# EAGLE board SM_Shield_Mega_Proto2.0 (EAGLE 9.5.2)
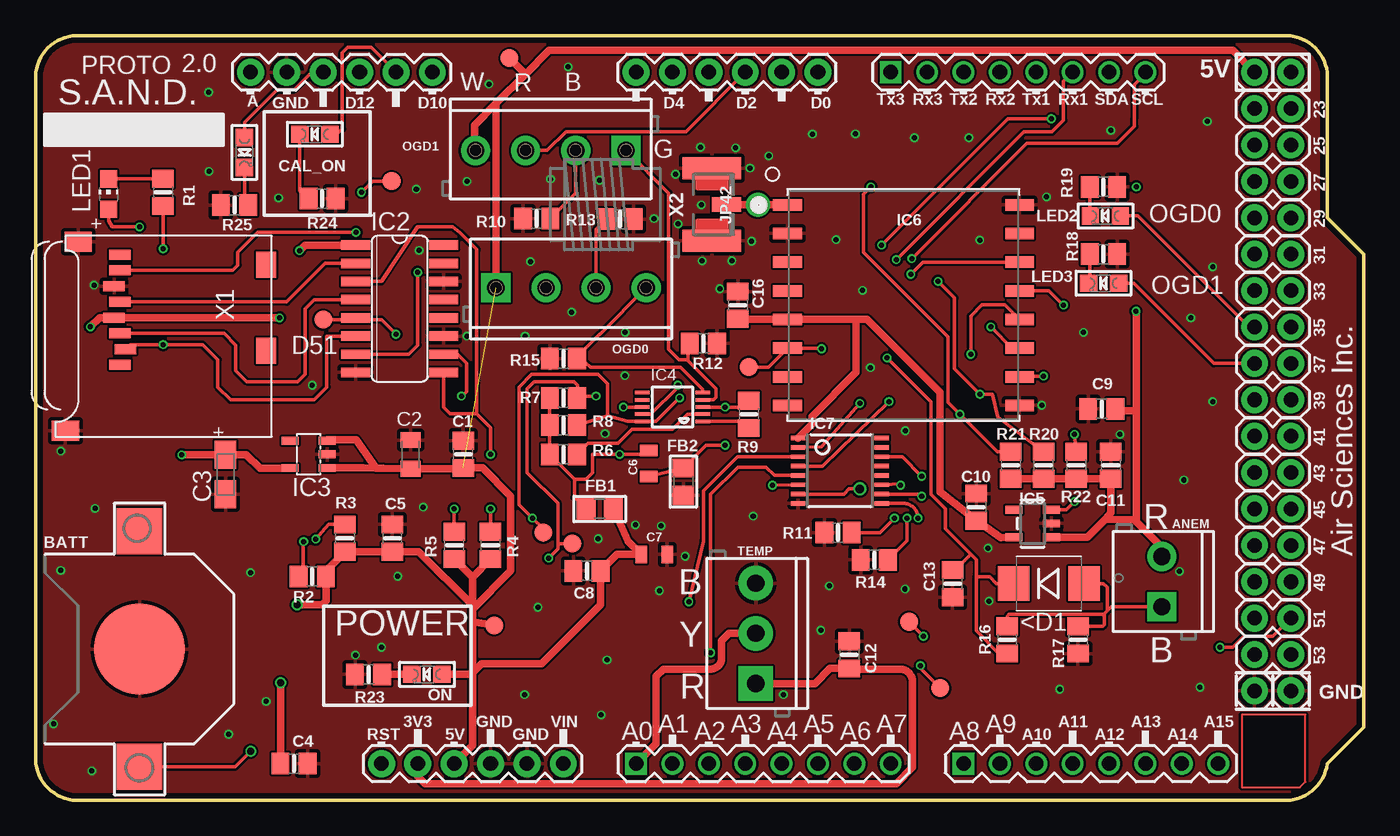
[diagram p0: board, top side]
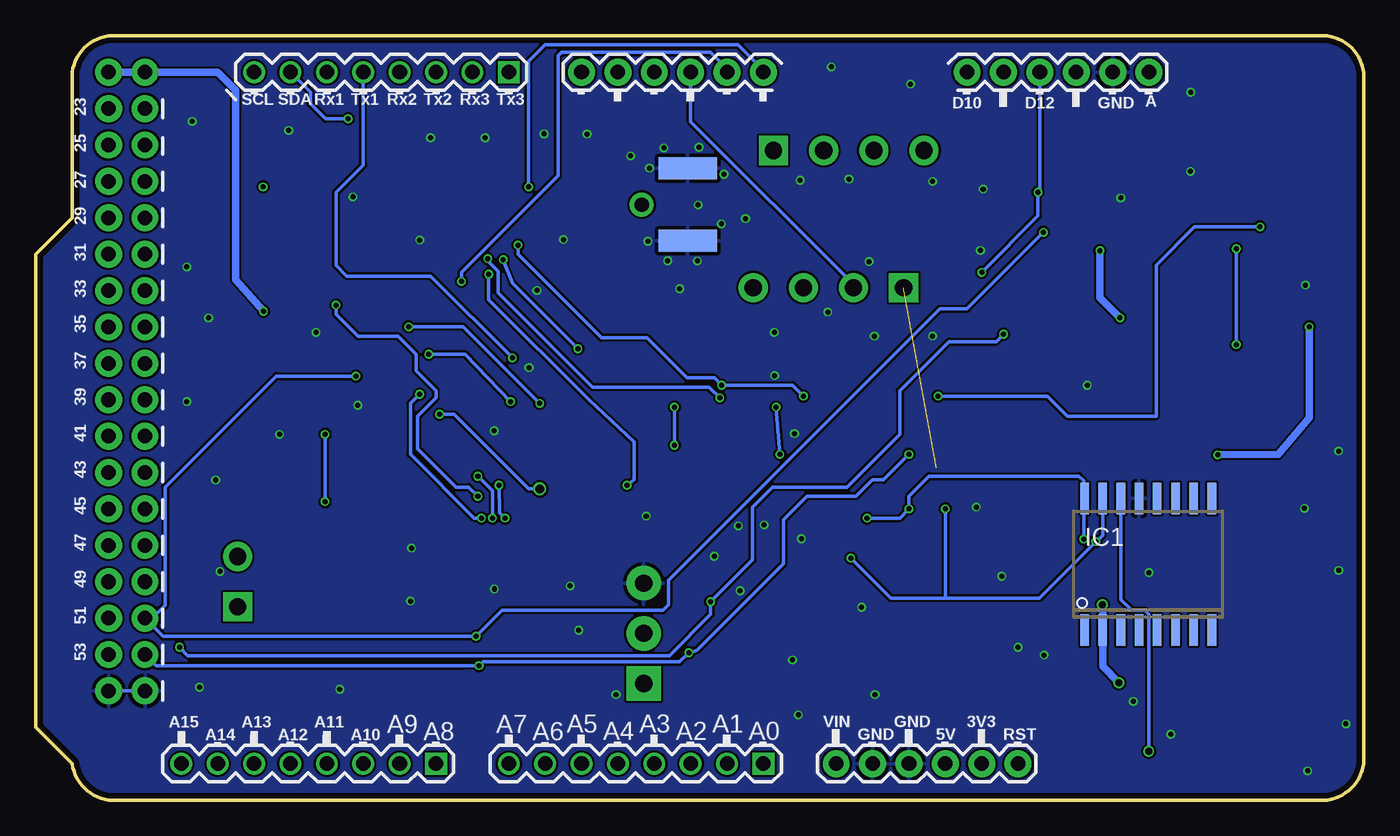
[diagram p1: board, bottom side, seen from below]

Size 92.71 x 53.34 mm. Coordinates in mm from the lower left corner, seen from the top.
Outline: 0,2.54 arc74 2.54,0 87.63,0 arc74 90.17,2.54 92.71,5.08 92.71,38.1 90.17,40.64 90.17,50.8 arc74 87.63,53.34 2.54,53.34 arc74 0,50.8 0,2.54
Copper layers (1*16): Top 0.035559375mm / dielectric 1.6mm / Bottom 0.035559375mm
Design rules "oshpark-2layer": minimum track width 6mil, minimum drill 10mil, track to track 6mil, track to pad 6mil, pad to pad 6mil, via to via 6mil, smd to smd 6mil, copper to edge 15mil, drill to drill 6mil, minimum pad ring 5mil, minimum via ring 5mil, stop-mask expansion 2.5mil, vias tented up to drill 0mil, thermal gap 10mil

## Footprints (pad centres in the part's own frame; a part is rotated, then mirrored left to right if it is on the bottom)
DIODE-HV = smd 2.2 x 2.4: A 2.454,0; C -2.454,0
SCREWTERMINAL-3.5MM-2 = drill 1.2 pad 2.032 square: 1 0,0 | drill 1.2 pad 2.032: 2 3.5,0
CR1220 = smd 3.2 x 3.2: +$1 -8.225,0; +$2 8.225,0 | smd 6.35 x 6.35: - 0,0
0805-NO = smd 1.24 x 1.5: 1 -0.95,0; 2 0.95,0
C0805K = smd 1.1 x 1.4: 1 -1,0; 2 1,0
A/3216-18R = smd 1.95 x 1.5: + 1.375,0; - -1.375,0
0805 = smd 0.8 x 1.2: 1 -0.9,0; 2 0.9,0
CHIPLED_0805 = smd 1.2 x 1.2: A 0,-1.05; C 0,1.05
B1,27 = smd 1.27 x 1.27: TP 0,0
0805' = smd 1.3 x 1.5: 1 -0.95,0; 2 0.95,0
SO16W = smd 0.6 x 2.2: 1 -4.445,-4.6; 2 -3.175,-4.6; 3 -1.905,-4.6; 4 -0.635,-4.6; 5 0.635,-4.6; 6 1.905,-4.6; 7 3.175,-4.6; 8 4.445,-4.6; 9 4.445,4.6; 10 3.175,4.6; 11 1.905,4.6; 12 0.635,4.6; 13 -0.635,4.6; 14 -1.905,4.6; 15 -3.175,4.6; 16 -4.445,4.6
SO16 = smd 0.66 x 2.032: 1 -4.445,-3.073; 2 -3.175,-3.073; 3 -1.905,-3.073; 4 -0.635,-3.073; 5 0.635,-3.073; 6 1.905,-3.073; 7 3.175,-3.073; 8 4.445,-3.073; 9 4.445,3.073; 10 3.175,3.073; 11 1.905,3.073; 12 0.635,3.073; 13 -0.635,3.073; 14 -1.905,3.073; 15 -3.175,3.073; 16 -4.445,3.073
SOT23-5L = smd 0.55 x 1.2: 1 -0.95,-1.3; 2 0,-1.3; 3 0.95,-1.3; 4 0.95,1.3; 5 -0.95,1.3
MSOP10 = smd 0.25 x 1: 1 -1,-2.113; 2 -0.5,-2.113; 3 0,-2.113; 4 0.5,-2.113; 5 1,-2.113; 6 1,2.113; 7 0.5,2.113; 8 0,2.113; 9 -0.5,2.113; 10 -1,2.113
SOT23-5 = smd 0.55 x 1.2: 1 -0.95,-1.3; 2 0,-1.3; 3 0.95,-1.3; 4 0.95,1.3; 5 -0.95,1.3
RFMHCW_SMT = smd 2 x 0.8: 1P 8.1,-7; 2P 8.1,-5; 3P 8.1,-3; 4P 8.1,-1; 5P 8.1,1; 6P 8.1,3; 7P 8.1,5; 8P 8.1,7; 9P -8.1,7; 10P -8.1,5; 11P -8.1,3; 12P -8.1,1; 13P -8.1,-1; 14P -8.1,-3; 15P -8.1,-5; 16P -8.1,-7
TSSOP16 = smd 0.305 x 0.991: 1 -2.275,-2.918; 2 -1.625,-2.918; 3 -0.975,-2.918; 4 -0.325,-2.918; 5 0.325,-2.918; 6 0.975,-2.918; 7 1.625,-2.918; 8 2.275,-2.918; 9 2.275,2.918; 10 1.625,2.918; 11 0.975,2.918; 12 0.325,2.918; 13 -0.325,2.918; 14 -0.975,2.918; 15 -1.625,2.918; 16 -2.275,2.918
1X08 = drill 1.016 square: 1 0,0 | drill 1.016: 2 2.54,0; 3 5.08,0; 4 7.62,0; 5 10.16,0; 6 12.7,0; 7 15.24,0; 8 17.78,0
1X02 = drill 1.016 pad 1.88: 1 0,0; 2 2.54,0
1X06 = drill 1.016 pad 1.88: 1 0,0; 2 2.54,0; 3 5.08,0; 4 7.62,0; 5 10.16,0; 6 12.7,0
1X01_ROUND = drill 1 pad 1.676: 1 0,0
CHIP-LED0805 = smd 1.2 x 1.2: A 0,-1.05; C 0,1.05
SCREWTERMINAL-3.5MM-4 = drill 1.2 pad 2.032 square: 1 0,0 | drill 1.2 pad 2.032: 2 3.5,0; 3 7,0; 4 10.5,0
SCREWTERMINAL-3.5MM-3 = drill 1.2 pad 2.413 square: 1 0,0 | drill 1.2 pad 2.413: 2 3.5,0; 3 7,0
MICROSD = smd 0.7 x 1.5: 1 9,-10.64; 2 7.9,-10.24; 3 6.8,-10.64; 4 5.7,-11.04; 5 4.6,-10.64; 6 3.5,-11.04; 7 2.4,-10.64; 8 1.3,-10.64 | smd 1.8 x 1.4: CD1 2,-0.44; CD2 8,-0.44 | smd 1.4 x 1.9: MT1 0.4,-13.54; MT2 13.6,-14.44
SMA_EDGELAUNCH_UFL = smd 4.064 x 1.524: GND@1 2.032,-2.54; GND@2 2.032,2.54 | smd 4.064 x 1.524 bottom: GND@3 2.032,2.54; GND@4 2.032,-2.54 | smd 2.032 x 1.016: P 3.048,0

## Placement (x,y rotation side)
<D1  [DIODE-HV]  70.74,15.11 0 top
ANEM  [SCREWTERMINAL-3.5MM-2]  78.63,13.5 90 top
BATT  CR1220  [CR1220]  7.24,10.54 90 top
C1  47uF  [0805-NO]  29.84,24.13 90 top
C2  0.1uF  [C0805K]  26.16,24.13 90 top
C3  10uF/10V  [A/3216-18R]  13.25,22.72 90 top
C4  1uF  [0805-NO]  18.03,2.54 180 top
C5  47uF  [0805-NO]  24.89,18.29 90 top
C6  1.0uF  [0805]  42.8,23.5 90 top
C7  1.0uF  [0805]  43.18,17.14 0 top
C8  47uF  [0805-NO]  38.48,16 180 top
C9  47uF  [0805-NO]  74.42,27.3 180 top
C10  10uF  [0805-NO]  65.66,20.45 90 top
C11  10uF  [0805-NO]  75.06,23.37 90 top
C12  47uF  [0805-NO]  56.79,10.13 90 top
C13  47uF  [0805-NO]  64.01,15.11 270 top
C16  0.1uF  [0805-NO]  49.02,34.54 90 top
CAL_ON  GREEN  [CHIPLED_0805]  19.48,46.47 90 top
D50  TPB1,27  [B1,27]  60.96,12.45 0 top
D51  TPB1,27  [B1,27]  20.07,33.53 0 top
D52  TPB1,27  [B1,27]  63.14,7.81 0 top
FB1  MMZ2012Y152B  [0805']  39.37,20.32 180 top
FB2  MMZ2012Y152B  [0805']  45.21,22.23 90 top
IC1  DS3231/SO  [SO16W]  15.05,16.46 0 bottom
IC2  4050D  [SO16]  25.4,34.29 270 top
IC3  LP298XS  [SOT23-5L]  19.05,24.13 90 top
IC4  ADS1115IDGST  [MSOP10]  44.45,27.43 90 top
IC5  AP2112K-3.3  [SOT23-5]  69.6,19.3 90 top
IC6  RFM9X  [RFMHCW_SMT]  60.58,34.54 180 top
IC7  74HC4050D  [TSSOP16]  56.13,22.99 270 top
J2  Analog  [1X08]  41.91,2.54 0 top
J5  Digital_14_21  [1X08]  59.69,50.8 0 top
JP1  [1X02]  87.63,48.26 180 top
JP7  [1X02]  85.09,45.72 0 top
JP8  [1X02]  85.09,43.18 0 top
JP9  [1X02]  85.09,40.64 0 top
JP11  [1X02]  85.09,38.1 0 top
JP15  [1X02]  85.09,35.56 0 top
JP16  [1X02]  85.09,33.02 0 top
JP17  [1X02]  85.09,30.48 0 top
JP19  [1X02]  85.09,27.94 0 top
JP23  [1X02]  85.09,25.4 0 top
JP24  [1X02]  85.09,22.86 0 top
JP25  [1X02]  85.09,20.32 0 top
JP27  [1X02]  85.09,17.78 0 top
JP29  [1X02]  85.09,15.24 0 top
JP31  [1X02]  85.09,12.7 0 top
JP33  [1X02]  85.09,10.16 0 top
JP34  [1X02]  85.09,50.8 0 top
JP35  [1X02]  85.09,7.62 0 top
JP36  [1X06]  54.61,50.8 180 top
JP38  [1X06]  14.99,50.8 0 top
JP42  [1X01_ROUND]  50.41,41.55 90 top
LED1  RED  [CHIP-LED0805]  5.08,42.29 0 top
LED2  BLUE  [CHIPLED_0805]  74.68,40.77 90 top
LED3  RED  [CHIPLED_0805]  74.55,36.07 90 top
OGD0  [SCREWTERMINAL-3.5MM-4]  32.12,35.76 0 top
OGD1  [SCREWTERMINAL-3.5MM-4]  41.2,45.34 180 top
ON  GREEN  [CHIPLED_0805]  27.3,8.78 90 top
PIN13  AMBER  [CHIPLED_0805]  14.57,45.2 180 top
POW1  TPB1,27  [B1,27]  32,12.19 0 top
POW2  TPB1,27  [B1,27]  33.07,51.78 0 top
POWER  Power  [1X06]  24.13,2.54 0 top
R1  1k  [0805-NO]  8.89,42.42 270 top
R2  10K  [0805-NO]  19.3,15.61 180 top
R3  10K  [0805-NO]  21.59,18.29 90 top
R4  10K  [0805-NO]  31.75,17.78 270 top
R5  10K  [0805-NO]  29.21,17.78 270 top
R6  10K  [0805-NO]  36.83,24.13 0 top
R7  10K  [0805-NO]  36.83,28.07 0 top
R8  10K  [0805-NO]  36.83,26.16 0 top
R9  10K  [0805-NO]  49.78,26.92 90 top
R10  220  [0805-NO]  34.96,40.58 180 top
R11  1k  [0805-NO]  56.01,18.67 180 top
R12  22k  [0805-NO]  46.61,31.88 0 top
R13  220  [0805-NO]  40.78,40.55 0 top
R14  1k  [0805-NO]  58.55,16.76 180 top
R15  22k  [0805-NO]  36.84,30.81 180 top
R16  360  [0805-NO]  67.82,11.18 90 top
R17  10K  [0805-NO]  72.77,11.18 270 top
R18  220  [0805-NO]  74.55,38.1 0 top
R19  220  [0805-NO]  74.55,42.8 0 top
R20  100K  [0805-NO]  70.36,23.37 270 top
R21  100K  [0805-NO]  68.07,23.37 270 top
R22  100K  [0805-NO]  72.64,23.37 90 top
R23  220  [0805-NO]  23.23,8.78 180 top
R24  220  [0805-NO]  19.99,41.97 0 top
R25  220  [0805-NO]  13.87,41.53 180 top
SCL  TPB1,27  [B1,27]  35.43,18.67 0 top
SD_DATA  TPB1,27  [B1,27]  24.84,43.19 0 top
SDA  TPB1,27  [B1,27]  37.47,17.91 0 top
SL4  Analog  [1X08]  64.77,2.54 0 top
TEMP  [SCREWTERMINAL-3.5MM-3]  50.27,8.14 90 top
TP10  TPB1,27  [B1,27]  49.78,30.23 0 top
X1  MICROSD  [MICROSD]  16.51,39.37 270 top
X2  uFL/SMA  [SMA_EDGELAUNCH_UFL]  45.16,41.57 0 top

## Library data of the parts
<D1 J2 J5 JP1 JP7-JP9 JP11 JP15-JP17 JP19 JP23-JP25 JP27 JP29 JP31 JP33-JP36 JP38 POWER SL4 = SparkFun
ANEM = SparkFun-Connectors; PROD_ID: CONN-08399
BATT C1 C4 C5 C8-C13 C16 CAL_ON FB1 FB2 IC4-IC7 JP42 LED2 LED3 ON PIN13 R1-R25 X2 = microbuilder
C2 C3 IC1 IC3 LED1 X1 = adafruit
C6 C7 = SparkFun-Capacitors; PROD_ID: CAP-11625
D50-D52 POW1 POW2 SCL SD_DATA SDA TP10 = testpad
IC2 = 40xx
OGD0 OGD1 = SparkFun-Connectors; PROD_ID: 2xCONN-08399; SF_ID: 2xPRT-08084
TEMP = SparkFun-Connectors; PROD_ID: CONN-08288; SF_ID: PRT-08235

## Nets
3V3: C12.1 POWER.2 TEMP.1
5V: ANEM.2 C1.1 C2.1 C4.2 C5.1 C7.1 C8.1 C9.1 C11.1 FB1.1 IC1.2 IC3.1 IC3.3 IC5.1 JP34.1 JP34.2 OGD0.1 OGD1.4 ON.A POW1.TP POW2.TP POWER.3 R2.1 R3.1 R4.2 R5.2 R20.2 R21.2 R22.1
32KHZ: IC1.1
!RTC_RST: IC1.4
A0: J2.1 TEMP.2
A1: J2.2
A2: J2.3
A3: J2.4
A4: J2.5
A5: J2.6
A6: J2.7
A7: J2.8
A8: SL4.1
A9: SL4.2
A10: SL4.3
A11: SL4.4
A12: SL4.5
A13: SL4.6
A14: SL4.7
A15: SL4.8
ADC_GND: C6.1 FB2.2 IC4.3 R9.2
ADCVDD: C6.2 FB1.2 IC4.8 R6.1 R7.1 R8.1
ADDR: IC4.1 R9.1
AIN0: IC4.4 OGD1.1 R12.1
AIN1: IC4.5 OGD0.4 R15.1
AIN2: IC4.6
AIN3: IC4.7
ALERT: IC4.2 R6.2
AREF: JP38.1
CD: X1.CD1
CS_3V: IC6.13P IC7.10
D0_RX: JP36.1
D1_TX: JP36.2
D2: JP36.3 OGD1.3
D3: JP36.4 OGD0.2
D4: IC7.9 JP36.5 R20.1
D5: IC7.7 JP36.6 R21.1
D10: JP38.6
D11: CAL_ON.A JP38.5
D12: IC2.7 JP38.4 SD_DATA.TP
D13: JP38.3 PIN13.A
D14_TX3: J5.1
D15_RX3: J5.2
D16_TX2: J5.3
D17_RX2: J5.4
D18_TX1: <D1.C C13.1 J5.5 R16.1
D19_RX1: IC6.6P J5.6 TP10.TP
D22: JP1.2
D23: JP1.1
D24: JP7.1
D25: JP7.2
D26: JP8.1
D27: JP8.2
D28: JP9.1
D29: JP9.2
D30: JP11.1
D31: JP11.2
D33: JP15.1
D34: JP16.1 LED2.A
D35: JP16.2
D36: JP17.1 LED3.A
D37: JP17.2
D38: JP19.1
D39: JP19.2
D40: JP23.1
D41: JP23.2
D42: JP24.1
D43: JP24.2
D44: JP25.1
D45: JP25.2
D46: JP27.1
D47: JP27.2
D48: JP29.1
D49: JP29.2
D50: D50.TP IC6.10P JP31.1 X1.7
D51: D51.TP IC2.5 IC7.3 JP31.2
D52: D52.TP IC2.3 IC2.9 IC7.5 JP33.1
D53: JP33.2
DIO1: IC6.7P
DIO2: IC6.8P
DIO3: IC6.3P
DIO4: IC6.4P
DIO5: IC6.15P
EN: IC5.3 R22.2
GND: BATT.- C1.2 C2.2 C3.- C4.1 C5.2 C7.2 C8.2 C9.2 C10.2 C11.2 C12.2 C13.2 C16.2 FB2.1 IC1.13 IC2.8 IC2.11 IC2.14 IC3.2 IC5.2 IC6.2P IC6.9P IC6.16P IC7.8 JP35.1 JP35.2 JP38.2 POWER.4 POWER.5 R10.2 R11.2 R12.2 R13.2 R14.2 R15.2 R17.2 R18.2 R19.2 R23.2 R24.2 R25.2 TEMP.3 X1.6 X1.MT1 X1.MT2 X2.GND@1 X2.GND@2 X2.GND@3 X2.GND@4
MOSI_3V: IC6.11P IC7.2
N$2: OGD1.2 R10.1
N$4: ON.C R23.1
N$5: CAL_ON.C R24.1
N$6: PIN13.C R25.1
N$12: IC7.11 R11.1
N$13: IC7.14 R14.1
N$203: IC2.10 LED1.A
N$337: IC2.2 X1.5
N$338: IC2.6 R1.2 X1.2
N$339: LED1.C R1.1
N$340: IC2.4 X1.3
N$342: IC6.1P JP42.1 X2.P
N$343: <D1.A ANEM.1 R16.2 R17.1
N$344: JP15.2
N$345: OGD0.3 R13.1
N$347: LED2.C R19.1
N$348: LED3.C R18.1
OUT: C10.1 C16.1 IC5.5 IC6.5P IC7.1
RESET: POWER.1
RST_3V: IC6.14P IC7.6
SCK_3V: IC6.12P IC7.4
SCL: IC1.16 IC4.10 J5.8 R3.2 R4.1 R8.2 SCL.TP
SDA: IC1.15 IC4.9 J5.7 R2.2 R5.1 R7.2 SDA.TP
SQW: IC1.3
VBAT: BATT.+$1 IC1.14
VDD: C3.+ IC2.1 IC3.5 X1.4
VIN: POWER.6

## Tracks (layer width: path | path; a pad name or v marks a point on that pad's centre or on a via)
3V3
  Top 0.254: C12.1 57.09,9.14
  Top 0.508: POWER.2 26.67,1.65 27.18,1.14 60.07,1.14 61.21,2.29 61.21,8.26 arc90 60.33,9.14 57.09,9.14 | TEMP.1 50.28,8.13 54.4,8.13 55.45,9.19 C12.1
5V  (via drill 0.35, 0.5)  (1 unrouted)
  Top 0.152: 30.62,45.42 OGD1.4
  Top 0.254: IC3.3 20.35,25.15 | C7.1 42.3,17.12 | 30.48,13.59 30.48,13.34 | R22.1 72.39,22.16 | 76.85,19.55 76.71,19.56 | 26.18,23.11 C2.1 | 75.5,27.18 C9.1 | 29.8,23.13 C1.1 | 20.25,16 R2.1
  Top 0.508: IC3.1 22.86,23.18 23.74,23.17 | 20.35,25.15 22.35,25.15 23.74,23.17 | R5.2 30.48,15.56 | 30.48,15.56 30.48,13.59 26.73,17.34 C5.1 R3.1 20.25,16 | 30.48,15.56 R4.2 | FB1.1 41.36,18.06 C7.1 40.57,17.14 C8.1 39.43,13.65 35.31,9.53 31.11,9.53 30.48,8.89 | 76.85,19.55 76.85,27.18 | 76.85,27.18 76.82,34.09 76.81,34.1 v76.81,34.11 | JP34.1 83.57,52.32 35.84,52.32 34.18,50.67 | 30.48,12.45 30.48,13.34 33.15,16 33.15,21.21 31.18,23.18 C1.1 | 30.48,12.45 30.48,8.89 | 74.68,19.61 75.06,20.07 C11.1 R22.1 R20.2 R21.2 | 74.68,19.61 76.71,19.56 78.63,17.64 ANEM.2 | 23.74,23.17 24.26,23.16 C2.1 29.8,23.13 | 76.85,27.18 | 76.85,27.18 75.5,27.18 | POW1.TP 30.48,12.45 | POWER.3 30.48,3.81 30.48,8.75 | 30.48,8.75 30.48,8.89 | C4.2 v17.08,8.19 | v18.24,13.63 19.98,13.63 20.25,13.9 R2.1 | 34.18,50.67 32.14,48.62 | 32.14,48.62 30.62,47.1 30.62,45.42 | OGD0.1 32.12,43.92 32.14,43.94 32.14,48.62 | POW2.TP 34.18,50.67 | ON.A 30.45,8.78 30.48,8.75 | IC5.1 73.42,18.35 74.68,19.61
  Bottom 0.508: JP34.2 JP34.1 80.01,50.8 78.74,49.53 78.74,36.32 v76.81,34.11 | v18.24,13.63 18.22,13.63 IC1.2 18.22,9.34 v17.08,8.19
A0
  Top 0.508: J2.1 43.31,3.94 43.31,8.64 43.81,9.14 47.12,9.14 arc90 47.88,9.91 47.88,11.11 48.41,11.64 TEMP.2
ADC_GND  (via drill 0.35)
  Top 0.254: v48.13,24.77 46.8,24.77 FB2.2 C6.1 | R9.2 49.77,27.43 v48.13,27.43 IC4.3
  Bottom 0.254: v48.13,27.43 v48.13,24.77
ADCVDD  (via drill 0.35)
  Top 0.254: R7.1 R8.1 R6.1 37.61,22.4 | 37.61,22.4 37.61,21.13 FB1.2 | 37.61,22.4 38.41,22.4 38.86,22.86 38.86,24.13 v40.77,24.13 42.53,24.13 C6.2 | IC4.8 v41.02,27.43
  Bottom 0.254: v41.02,27.43 v40.77,24.13
ADDR
  Top 0.254: R9.1 49.22,26.43 IC4.1
AIN0
  Top 0.254: IC4.4 47.33,27.93 47.5,28.11 47.5,28.7 45.53,30.67 | 45.53,30.67 45.53,31.75 R12.1 | OGD1.1 44.18,42.35 44.18,31.47 44.91,30.75 45.45,30.75 45.53,30.67
AIN1
  Top 0.254: IC4.5 46.56,28.69 45.02,30.23 38.73,30.23 38.39,30.52 38.05,30.81 R15.1 37.79,30.95 39.37,32.52 39.38,32.52 OGD0.4
ALERT
  Top 0.254: R6.2 38.54,24.89 40.64,24.89 41.62,25.87 44.45,25.87 45.5,26.92 IC4.2
CS_3V  (via drill 0.35)
  Top 0.254: v61.85,21.21 61.7,21.36 IC7.10 | v71.75,34.54 70.74,35.56 68.69,35.56 IC6.13P
  Bottom 0.254: v61.85,21.21 62.48,21.84 63.37,21.84 66.04,24.51 66.04,26.8 64.77,28.07 64.77,28.57 66.17,29.97 66.17,31.11 67.41,32.36 70.21,32.36 71.75,33.91 v71.75,34.54
D2
  Top 0.254: OGD1.3 35.71,45.34 37.03,46.66 45.39,46.66 JP36.3
D3
  Bottom 0.254: JP36.4 46.99,47.36 35.62,35.99 OGD0.2
D4  (via drill 0.35)
  Top 0.254: IC7.9 60.57,20.71 arc-90 v61.59,19.68 | R20.1 67.18,26.7 66.77,28.32 v65.91,28.32 64.14,30.1 64.14,35.05 v62.99,36.2
  Bottom 0.254: v61.59,19.68 62.1,19.68 66.55,24.13 66.55,27.69 v65.91,28.32 | v62.99,36.2 62.99,36.83 56.26,43.56 56.26,51.94 56.01,52.2 45.59,52.2 44.45,51.05 JP36.5
D5  (via drill 0.35, 0.61)
  Top 0.254: IC7.7 56.41,21.36 56.77,21.72 v57.53,21.72 | R21.1 67.12,24.32 v64.52,26.92 63.66,27.77 63.66,32.35 57.78,38.23 57.78,42.29 v58.29,42.8
  Bottom 0.254: v64.52,26.92 63.5,26.92 58.29,21.72 v57.53,21.72 | v58.29,42.8 58.29,51.56 57.15,52.7 43.69,52.7 41.91,50.93 JP36.6
D11
  Top 0.254: CAL_ON.A 21.01,46.47 21.39,46.84 21.39,52.16 21.78,52.55 23.39,52.55 JP38.5
D12  (via drill 0.35)
  Top 0.254: IC2.7 26.04,31.11 26.67,31.75 v26.67,36.83 | v22.73,42.42 23.51,43.19 SD_DATA.TP
  Bottom 0.254: v26.67,36.83 22.73,40.77 v22.73,42.42 22.61,42.55 JP38.4
D13
  Top 0.254: PIN13.A 14.57,47.3 16.85,49.58 18.03,49.58 19.25,50.8 JP38.3
D18_TX1  (via drill 0.35)
  Top 0.254: R16.1 67.24,10.23 65.66,11.81 65.66,15.58 | <D1.C 67.07,15.11 66.6,15.58 65.66,15.58 | 65.28,17.14 65.66,16.76 65.66,15.58 | 65.28,17.14 63.5,18.92 63.5,20.32 62.48,21.34 62.48,27.81 v59.44,30.86 | 65.28,17.14 64.2,16.06 C13.1
  Bottom 0.254: v59.44,30.86 65.15,36.58 70.99,36.58 71.75,37.34 71.75,42.42 69.85,44.32 J5.5
D19_RX1  (via drill 0.35)
  Top 0.254: v54.86,31.5 54.86,31.54 IC6.6P 51.16,30.23 TP10.TP | v60.07,37.72 68.99,46.63 70.94,46.63 71.75,47.45 71.75,50.16 J5.6
  Bottom 0.254: v54.86,31.5 59.44,36.07 v60.07,37.72
D34
  Top 0.254: LED2.A 76.93,40.77 84.68,33.02 JP16.1
D36
  Top 0.254: JP17.1 82.23,30.48 76.65,36.07 LED3.A
D50  (via drill 0.35)
  Top 0.254: v22.35,39.62 15.49,39.62 14.11,38.24 14.11,37.34 13.74,36.97 X1.7 | v70.36,29.59 68.73,29.59 arc90 IC6.10P | D50.TP v61.98,11.43
  Bottom 0.254: v22.35,39.62 27.69,34.29 29.59,34.29 48.54,15.34 48.54,13.64 48.93,13.25 50.88,13.25 60.16,13.25 v61.98,11.43 83.82,11.43 JP31.1 84.58,12.7 83.69,13.59 83.69,21.84 75.95,29.59 v70.36,29.59
D51  (via drill 0.35)
  Top 0.254: IC2.5 22.45,33.53 | 22.45,33.53 24.13,33.53 v25.15,32.51 | IC7.3 48.98,23.96 46.61,21.59 46.61,18.08 v45.59,13.84 | D51.TP 22.45,33.53 | JP31.2 86.36,11.43 84.33,11.43 83.57,10.67 v82.68,10.67
  Bottom 0.254: v25.15,32.51 25.65,32 28.96,32 32.38,28.57 32.38,25.53 36.07,21.84 41.27,21.84 42.67,20.45 42.67,16.76 v45.59,13.84 45.59,12.95 48.46,10.08 82.09,10.08 v82.68,10.67
D52  (via drill 0.35)
  Top 0.254: IC2.9 28.47,27.41 28.93,26.95 30.79,26.95 | v47.12,10.29 47.12,21.34 49.02,23.24 50.99,23.24 51.56,22.66 IC7.5 | IC2.3 24.13,36.2 26.67,40.01 29.08,40.01 29.59,39.62 30.79,38.43 30.79,26.95 | D52.TP 61.76,9.2 v61.76,9.38 | v31.75,24.13 31.75,25.98 30.79,26.95
  Bottom 0.254: v31.75,24.13 33.53,22.35 34.29,22.35 35.43,21.21 38.86,21.21 40.51,19.56 40.51,16.51 46.55,10.47 v47.12,10.29 47.75,9.65 61.47,9.65 61.73,9.38 v61.76,9.38 62.83,9.38 62.83,9.39 84.31,9.39 85.08,10.16 JP33.1
EN  (via drill 0.35)
  Top 0.254: IC5.3 71.94,20.25 71.95,20.26 v72.52,20.83 | v72.52,25.53 R22.2
  Bottom 0.254: v72.52,20.83 v72.52,25.53
GND  (via drill 0.35)
  Bottom 0.254: JP35.1 JP35.2
  other vias: 24.13,10.67 35.05,13.46 25.27,15.62 27.05,20.45 16.08,6.88 14.99,15.88 12.09,43.88 31.64,49.97 12.06,49.4 37.17,51.17 46.41,45.57 51.18,44.96 61.34,46.23 54.23,46.48 65.15,46.23 55.88,39.12 73.15,32.64 60.71,25.78 82.17,27.81 80.64,33.66 82.17,37.21 81.79,47.37 79.84,15.96 81.28,7.87 41.15,32.64 34.16,32.38 30.1,32.38 26.76,38.37 75.69,25.53 70.23,27.56 46.52,37.63 49.97,39 47.75,35.69 49.86,44.11 48.86,45.52 4.06,35.94 45.34,17.02 39.88,9.78 52.2,7.37 75.06,46.74 19.3,28.96 35.94,43.35 39.34,43.26 34.53,37.58 43.17,40.59 37.41,34.06 30.1,43.18 26.57,42.65 16.95,42.02 60.69,14.73 50.09,19.82 80.15,22.34 71.49,7.73 46.47,41.54 43.54,14.61 34.12,7.37 39.47,5.94 55.4,14.95 54.8,11.85 43.66,19.14 41.86,19.2 39.27,18.24 57.72,35.57 58.27,30.19 65.9,39.08 70.56,42.1 1.74,16.03 1.24,5.32 4.14,20.36 3.91,2.03 1.75,24.36 22.31,10.12 66.48,17.59 66.55,13.89 57.23,46.49 41.12,29.63 39.74,25.58 13.46,4.6 48.59,37.64 44.67,43.68 44.84,40.21
  pour Bottom: 0,50.8 arc-74 2.54,53.34 87.63,53.34 arc-74 90.17,50.8 90.17,40.64 92.71,38.1 92.71,5.08 90.17,2.54 arc-74 87.63,0 2.54,0 arc-90 0,2.54
  pour Top: 0,50.8 arc-74 2.54,53.34 87.63,53.34 arc-74 90.17,50.8 90.17,40.64 92.71,38.1 92.71,5.08 90.17,2.54 arc-74 87.63,0 2.54,0 arc-74 0,2.54
  pour Bottom: 88.65,51.94 88.9,51.69 88.9,50.93
MOSI_3V  (via drill 0.35)
  Top 0.254: v66.67,33.02 68.2,31.5 68.63,31.5 IC6.11P | IC7.2 54.84,24.65 v57.53,27.69
  Bottom 0.254: v66.67,33.02 62.87,33.02 v57.53,27.69
N$1
  Top 0.152: 84.2,5.97 84.2,0.89 88.27,0.89 88.65,1.27 88.65,5.97 84.2,5.97
N$2
  Top 0.254: OGD1.2 37.7,42.36 R10.1
N$3  (via drill 0.35)
  other vias: 76.83,42.8
N$4
  Top 0.508: ON.C R23.1
N$5
  Top 0.254: CAL_ON.C 18.43,42.51 19.04,41.99 R24.1
N$6
  Top 0.254: PIN13.C 14.57,41.78 R25.1
N$12  (via drill 0.35)
  Top 0.254: IC7.11 60.49,22.09 v60.37,21.97 | v59.94,19.68 58.93,18.67 R11.1
  Bottom 0.254: v60.37,21.97 60.33,20.07 v59.94,19.68
N$13  (via drill 0.35)
  Top 0.254: IC7.14 60.49,23.96 v61.85,22.61 | v60.83,19.68 60.83,18.1 R14.1
  Bottom 0.254: v61.85,22.61 60.83,21.59 v60.83,19.68
N$203  (via drill 0.35)
  Top 0.254: IC2.10 29.46,31.11 30.09,30.49 30.09,28.5 v29.72,28.19 | v7.24,40.01 5.35,40.01 5.08,40.44 LED1.A
  Bottom 0.254: v29.72,28.19 22.1,28.19 20.7,26.8 14.48,26.8 14.48,37.34 11.81,40.01 v7.24,40.01
N$337
  Top 0.254: IC2.2 20.21,37.47 17.52,34.77 X1.5
N$338  (via drill 0.35)
  Top 0.254: X1.2 6.59,31.79 v8.89,31.79 11.65,31.79 12.7,30.73 12.7,28.83 13.59,27.94 19.43,27.94 20.32,28.83 20.32,32.38 IC2.6 | v8.89,38.48 R1.2
  Bottom 0.254: v8.89,31.79 v8.89,38.48
N$339
  Top 0.254: R1.1 5.11,43.37 LED1.C
N$340
  Top 0.254: IC2.4 19.43,34.92 18.8,34.29 18.8,29.72 18.29,29.21 14.73,29.21 13.97,29.97 13.97,31.75 13.15,32.57 X1.3
N$342
  Top 0.508: X2.P 49.11,41.57 49.12,41.55 JP42.1 IC6.1P
N$343
  Top 0.254: R17.1 74.48,12.13 74.59,12.23 74.59,12.83 | R16.2 67.82,12.83 67.94,12.95 74.46,12.95 74.59,12.83 | <D1.A 74.55,15.11 74.82,14.84 74.82,13.22 | 74.59,12.83 74.59,12.99 74.82,13.22 | 74.82,13.22 75.1,13.5 ANEM.1
N$345
  Top 0.254: OGD0.3 39.12,39.84 R13.1
N$347
  Top 0.254: LED2.C 73.6,40.79 R19.1
N$348
  Top 0.254: LED3.C 73.6,36.17 R18.1
OUT
  Top 0.254: 49.07,33.54 C16.1 | C10.1 65.55,19.58
  Top 0.508: 49.07,33.54 IC6.5P 57.28,33.54 | 57.28,33.54 58.02,33.54 63.12,28.45 63.12,21.53 65.55,19.58 67.39,18.32 IC5.5 | IC7.1 54.18,26.23 54.18,26.75 57.28,29.84 57.28,33.54
RST_3V  (via drill 0.35)
  Top 0.254: IC6.14P 61.93,37.54 v61.09,36.7 | v51.44,21.97 IC7.6
  Bottom 0.254: v61.09,36.7 61.09,34.92 54.1,27.94 50.93,25.02 50.93,22.35 v51.44,21.97
SCK_3V  (via drill 0.35)
  Top 0.254: IC7.4 54.94,23.31 v59.56,27.81 | v65.28,31.11 65.28,33.78 66.06,34.56 67.66,34.56 IC6.12P
  Bottom 0.254: v59.56,27.81 62.74,31.11 v65.28,31.11
SCL  (via drill 0.35)
  Top 0.254: v31.75,20.32 R4.1 | 39.9,26.81 39.9,29.06 39.24,29.72 34.62,29.72 33.73,28.83 33.73,20.62 v34.67,19.68 35.43,18.92 SCL.TP | 39.9,26.81 41.3,26.43 IC4.10 42.36,26.45 43.31,26.45 44.93,28.07 v44.96,28.07 | 39.9,26.81 R8.2 | J5.8 77.47,50.67 76.71,49.91 76.71,47.64 76.71,47.03 75.51,45.83 69.2,45.83 v61.16,37.79 | R3.2 20.45,19.24 v19.55,18.21
  Bottom 0.254: v34.67,19.68 32.38,19.68 v31.75,20.32 31.75,21.21 30.35,22.61 19.88,22.61 19.55,22.28 19.55,21.14 19.56,21.12 IC1.16 19.55,21.01 v19.55,18.21 | v44.96,28.07 45.72,28.83 53.85,28.83 60.43,35.41 60.43,36.92 61.16,37.65 v61.16,37.79
SDA  (via drill 0.35)
  Top 0.254: 36.45,17.91 36.45,20.7 34.29,22.86 34.29,28.7 34.8,29.21 37.57,29.21 37.82,28.96 37.82,28.11 R7.2 37.78,28.19 v39.12,28.19 | 36.45,17.91 36.45,17.53 v35.81,16.89 | v29.21,20.32 R5.1 | v44.83,28.96 44.83,28.83 42.93,26.93 IC4.9 | v59.05,38.73 67.87,47.55 v70.9,47.55 | SDA.TP 36.45,17.91 | v18.7,18.04 18.67,18.01 18.67,15.93 R2.2
  Bottom 0.254: 29.21,14.1 33.02,14.1 v35.81,16.89 | v29.21,20.32 29.21,14.1 | v39.12,28.19 39.88,28.96 v44.83,28.96 45.34,29.46 47.24,29.46 50.04,32.26 53.21,32.26 59.05,38.1 v59.05,38.73 | v70.9,47.55 72.49,47.55 73.53,48.59 73.53,49.4 J5.7 | 29.21,14.1 22.65,14.1 20.07,16.68 20.06,16.68 v18.7,18.04 18.68,18.02 18.22,18.48 IC1.15
VBAT  (via drill 0.5)
  Top 0.254: BATT.+$1 13.91,2.32 v15.01,3.42
  Bottom 0.254: IC1.14 16.95,13.99 16.2,13.24 15.27,13.24 14.99,12.96 14.99,3.43 v15.01,3.42
VDD  (via drill 0.35)
  Top 0.254: v17.02,33.66 17,33.67
  Top 0.508: 17,33.67 X1.4 4.46,33.67 v3.81,33.02 | IC2.1 18.8,38.73 v18.41,38.35 | v10.2,24.09 C3.+ 14.7,24.09 15.65,23.15 17.72,23.15 IC3.5
  Bottom 0.508: v3.81,33.02 3.81,26.67 5.97,24.13 v10.2,24.09 | v17.02,33.66 18.41,35.05 v18.41,38.35

## Text on the board
tPlace: PROTO | 2.0 | W | B | 5V | S.A.N.D. | R | Tx3 | Rx3 | Tx2 | Rx2 | Tx1 | Rx1 | SDA | SCL | A | GND | D12 | D10 | D4 | D2 | D0 | 23 | G | 25 | 27 | OGD0 | 29 | 31 | OGD1 | 33 | Air Sciences Inc. | 35 | 37 | 39 | 41 | 43 | 45 | R | 47 | 49 | B | 51 | POWER | Y | B | 53 | R | GND | 3V3 | GND | VIN | A1 | A3 | A5 | A7 | A9 | A11 | A13 | A15 | RST | 5V | GND | A0 | A2 | A4 | A6 | A8 | A10 | A12 | A14
bPlace: Tx3 | Rx3 | Tx2 | Rx2 | Tx1 | Rx1 | SDA | SCL | 23 | A | GND | D12 | D10 | 25 | 27 | 29 | 31 | 33 | 35 | 37 | 39 | 41 | 43 | 45 | 47 | 49 | 51 | 53 | 3V3 | GND | VIN | A1 | A3 | A5 | A7 | A9 | A11 | A13 | A15 | RST | 5V | GND | A0 | A2 | A4 | A6 | A8 | A10 | A12 | A14